# EAGLE board pianoExample (EAGLE 7.6.0)

Size 73.58 x 63.39 mm. Coordinates in mm from the lower left corner, seen from the top.
Outline: 0,0 56.82,0 56.82,53.33 0,53.33 0,0
Copper layers (1*16): Top 0.035mm / dielectric 1.5mm / Bottom 0.035mm
Design rules "default": minimum track width 10mil, minimum drill 24mil, track to track 8mil, track to pad 8mil, pad to pad 8mil, via to via 8mil, smd to smd 8mil, copper to edge 40mil, drill to drill 8mil, minimum pad ring 10mil, minimum via ring 8mil, stop-mask expansion 4mil, vias tented up to drill 0mil, thermal gap 10mil

## Footprints (pad centres in the part's own frame; a part is rotated, then mirrored left to right if it is on the bottom)
LED5MM = drill 0.813 octagon: A -1.27,0; K 1.27,0
LED-RGB-THRU = drill 0.762 pad 0.889 long: 1 1.905,0; 2 0.635,0; 3 -0.635,0; 4 -1.905,0
PIEZO-22MM = drill 1 pad 2.54: P$1 -5,0; P$2 5,0
0207/10 = drill 0.813 octagon: 1 -5.08,0; 2 5.08,0
B25V = drill 0.813 long: A 2.54,0.635; E -2.54,0.635; S 0,0.635
TL1105 = drill 1 pad 1.676: 1 -2.25,3.25; 2 2.25,3.25; 3 -2.25,-3.25; 4 2.25,-3.25
ARDUINO_UNO = drill 1.016 pad 1.88: 0 63.5,50.8; 1 60.96,50.8; 2 58.42,50.8; 3 55.88,50.8; 3.3V 35.56,2.54; 4 53.34,50.8; 5 50.8,50.8; 5V 38.1,2.54; 6 48.26,50.8; 7 45.72,50.8; 8 41.656,50.8; 9 39.116,50.8; 10 36.576,50.8; 11 34.036,50.8; 12 31.496,50.8; 13 28.956,50.8; A0 50.8,2.54; A1 53.34,2.54; A2 55.88,2.54; A3 58.42,2.54; A4 60.96,2.54; A5 63.5,2.54; AREF 23.876,50.8; GND 26.416,50.8; GND. 43.18,2.54; GND.. 40.64,2.54; I/OREF 30.48,2.54; N/C 27.94,2.54; RESET 33.02,2.54; SCL 18.796,50.8; SDA 21.336,50.8; VIN 45.72,2.54 | hole 3.2: 66.04,7.62; 66.04,35.56; 15.24,50.8; 13.97,2.54

## Placement (x,y rotation side)
D1  [LED5MM]  5,48.18 0 top
D2  [LED-RGB-THRU]  5,302.18 0 top  (outside the outline)
PIEZO1  [PIEZO-22MM]  5,22.78 0 top
R1  220‎Ω  [0207/10]  5,60.88 0 top
R2  10k‎Ω  [0207/10]  5,187.88 0 top  (outside the outline)
R3  10k‎Ω  [0207/10]  5,200.58 0 top  (outside the outline)
R4  10k‎Ω  [0207/10]  5,213.28 0 top  (outside the outline)
R5  10k‎Ω  [0207/10]  5,225.98 0 top  (outside the outline)
R6  10k‎Ω  [0207/10]  5,238.68 0 top  (outside the outline)
R7  10k‎Ω  [0207/10]  5,251.38 0 top  (outside the outline)
R8  10k‎Ω  [0207/10]  5,264.08 0 top  (outside the outline)
R9  10k‎Ω  [0207/10]  5,276.78 0 top  (outside the outline)
R10  10k‎Ω  [0207/10]  5,289.48 0 top  (outside the outline)
R11  220‎Ω  [0207/10]  5,327.58 0 top  (outside the outline)
R12  220‎Ω  [0207/10]  5,340.28 0 top  (outside the outline)
R13  220‎Ω  [0207/10]  5,352.98 0 top  (outside the outline)
R14  800‎Ω  [0207/10]  5,314.88 0 top  (outside the outline)
Rpot1  1k‎Ω  [B25V]  5,35.48 0 top
S1  [TL1105]  5,73.58 0 top  (outside the outline)
S2  [TL1105]  5,86.28 0 top  (outside the outline)
S3  [TL1105]  5,98.98 0 top  (outside the outline)
S4  [TL1105]  5,111.68 0 top  (outside the outline)
S5  [TL1105]  5,124.38 0 top  (outside the outline)
S6  [TL1105]  5,137.08 0 top  (outside the outline)
S7  [TL1105]  5,149.78 0 top  (outside the outline)
S8  [TL1105]  5,162.48 0 top  (outside the outline)
S9  [TL1105]  5,175.18 0 top  (outside the outline)
U1  [ARDUINO_UNO]  5,10.08 0 top

## Library data of the parts
D1 D2 PIEZO1 R1-R14 Rpot1 S1-S9 U1 = AUTODESK_CIRCUITS_BREADBOARD

## Nets
N$1: R1.2 U1.13
N$2: D1.A R1.1
N$3: S1.4
N$4: R2.1 S1.2 U1.2
N$5: S1.1
N$6: S4.4
N$7: R3.1 S4.2 U1.3
N$8: S4.1
N$9: S5.4
N$10: R4.1 S5.2 U1.4
N$11: S5.1
N$12: S6.4
N$13: R5.1 S6.2 U1.5
N$14: S6.1
N$15: S7.4
N$16: R6.1 S7.2 U1.6
N$17: S7.1
N$18: S8.4
N$19: R7.1 S8.2 U1.7
N$20: S8.1
N$21: S9.4
N$22: R8.1 S9.2 U1.8
N$23: S9.1
N$24: S3.4
N$25: R9.1 S3.2 U1.9
N$26: S3.1
N$27: S2.4
N$28: R10.1 S2.2 U1.10
N$29: S2.1
N$30: D2.2 U1.GND.
N$31: S1.3 S2.3 S3.3 S4.3 S5.3 S6.3 S7.3 S8.3 S9.3 U1.5V
N$32: D1.K R14.1
N$33: PIEZO1.P$2 R2.2 R3.2 R4.2 R5.2 R6.2 R7.2 R8.2 R9.2 R10.2 Rpot1.E U1.GND..
N$34: PIEZO1.P$1 Rpot1.S
N$35: R14.2 Rpot1.A
N$36: D2.1 R11.2
N$37: R11.1 U1.A2
N$38: D2.3 R13.2
N$39: R13.1 U1.A1
N$40: D2.4 R12.2
N$41: R12.1 U1.A0

## Tracks (layer width: path | path; a pad name or v marks a point on that pad's centre or on a via)
N$1  (1 unrouted)
N$2  (1 unrouted)
N$4  (2 unrouted)
N$7  (2 unrouted)
N$10  (2 unrouted)
N$13  (2 unrouted)
N$16  (2 unrouted)
N$19  (2 unrouted)
N$22  (2 unrouted)
N$25  (2 unrouted)
N$28  (2 unrouted)
N$30  (1 unrouted)
N$31  (9 unrouted)
N$32  (1 unrouted)
N$33  (11 unrouted)
N$34  (1 unrouted)
N$35  (1 unrouted)
N$36  (1 unrouted)
N$37  (1 unrouted)
N$38  (1 unrouted)
N$39  (1 unrouted)
N$40  (1 unrouted)
N$41  (1 unrouted)